# Altium PCB Copy of auto switch electric bike charger_PCB.PcbDoc
Units mil, origin at the board's own origin, x right, y up, seen from the top; angles counter-clockwise.
Board outline 5122.14 x 2410.03 mil, 2 copper layers (Top Layer, Bottom Layer); 10 components, 26 nets, 103 pads, 0 vias.
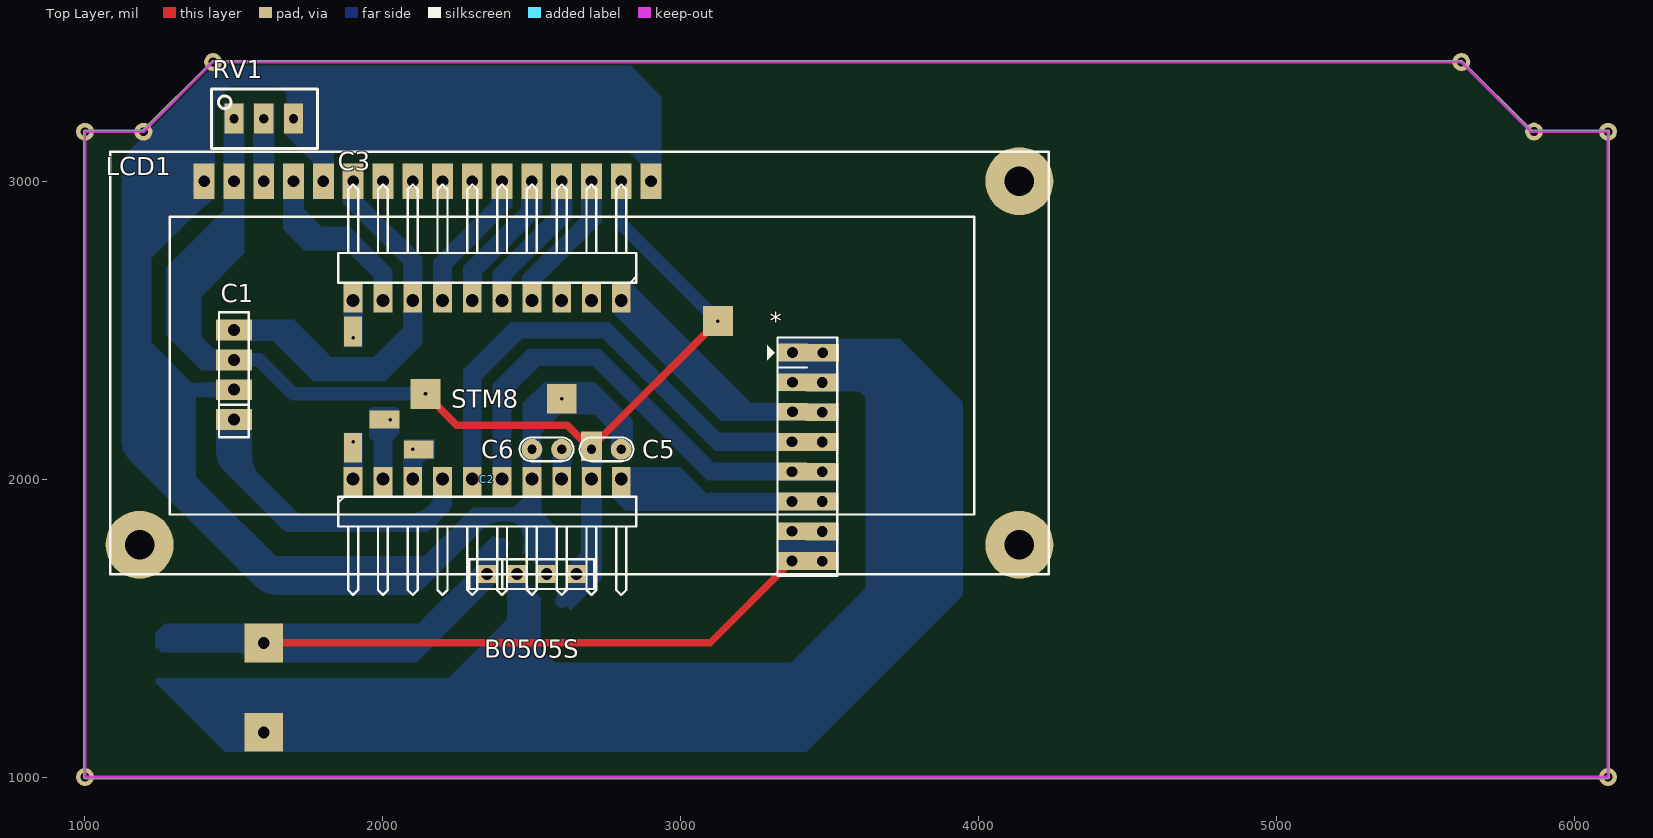
[diagram p0: Top Layer view]
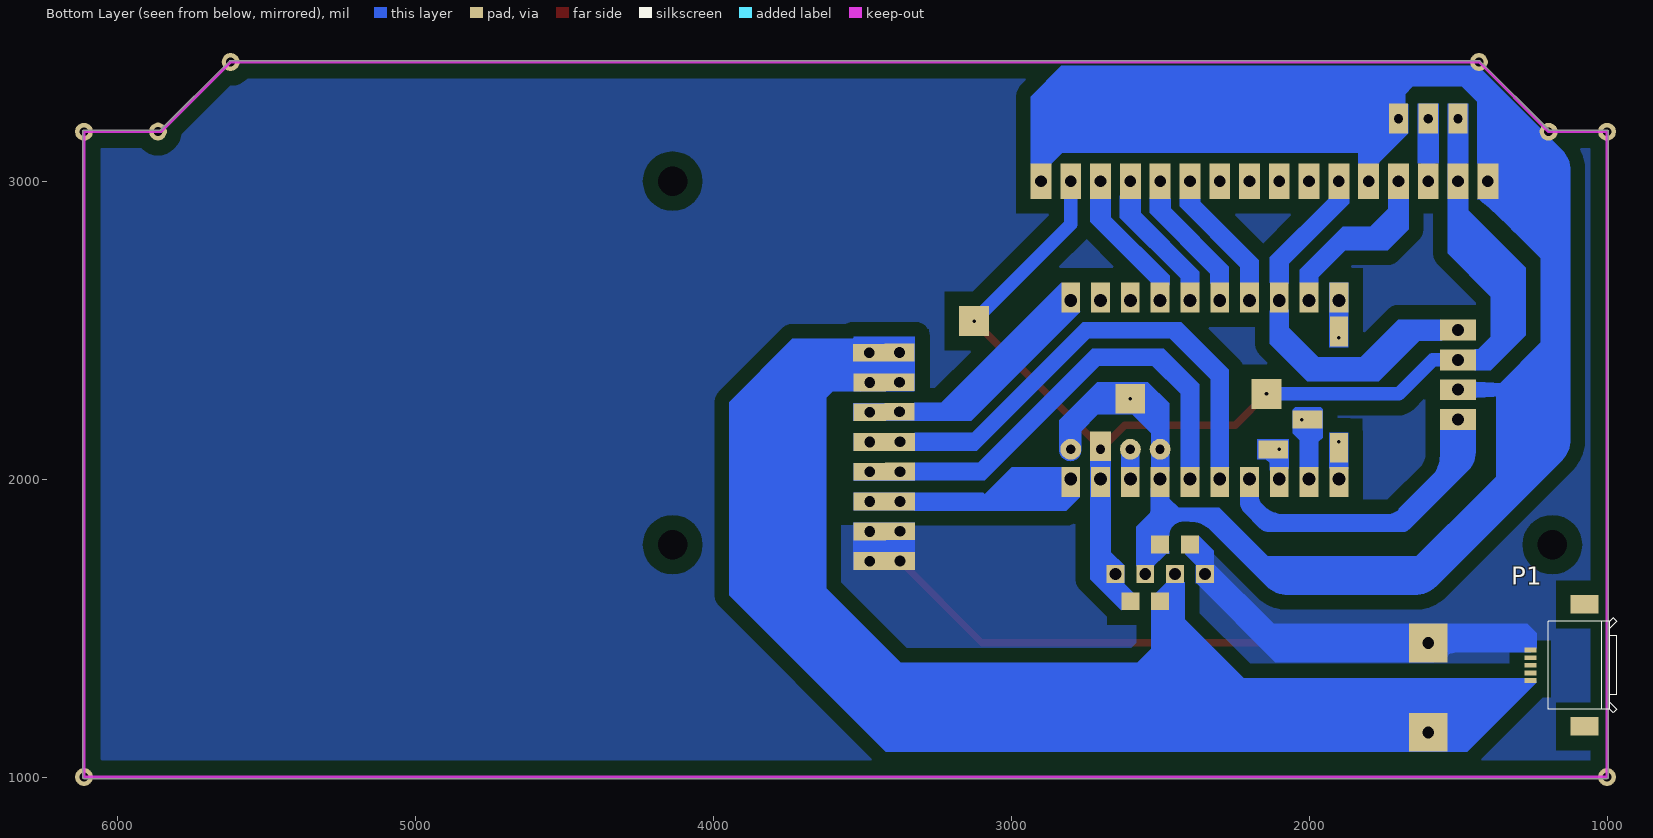
[diagram p1: Bottom Layer view, seen from below]

## Layer stack, top to bottom
Top Solder: solder mask 0.4, Solder Resist, Dk 3.5
Top Layer: signal copper 1.4
Dielectric 1: dielectric 12.6, FR-4, Dk 4.8
Bottom Layer: signal copper 1.4
Bottom Solder: solder mask 0.4, Solder Resist, Dk 3.5

## Board outline
994.99,1000 994.99,3166 cw(c1000,3166) 1000,3171.01 1193.92,3171.01 1426.45,3403.55 1426.44,3403.53 cw(c1430,3400) 1430,3405.01 5620,3405.01 cw(c5620,3400) 5623.56,3403.53 5623.55,3403.55 5856.08,3171.01 6112.11,3171.01 cw(c6112.11,3166) 6117.13,3166 6117.13,1000 cw(c6112.11,1000) 6112.11,994.99 1000,994.99 cw(c1000,1000)

## Design rules (kind name [scope] priority, off if disabled: settings)
Clearance [All] p1: gap=50 ignorepadtopadclearanceinfootprint=FALSE except(0: Arc-Hole Track-Hole SMDPad-Hole THPad-Hole Via-Hole Fill-Hole Poly-Hole Region-Hole Text-Hole)
PlaneClearance [All] p1: clearance=23
PlaneConnect [All] p1: planeconnectstyle=Direct reliefexpansion=20 reliefentries=4 reliefconductorwidth=10 reliefairgap=10
PolygonConnect [All] p1: connectstyle=Direct reliefconductorwidth=10 reliefentries=4 polygonreliefangle="90 Angle" airgapwidth=10
RoutingVias [All] p1: holewidth=28 width=50 viastyle="Through Hole" minholewidth=28 minwidth=50 maxholewidth=28 maxwidth=50
SolderMaskExpansion [All] p1: expansion=4
Width [All] p1: maxlimit=45 minlimit=15 preferedwidth=30 toplayer_minwidth=25 toplayer_maxwidth=40 minimp=50.000000 maximp=50.000000 favimp=50.000000
28 further rules are at their usual default settings.

## Components (designator, comment, footprint, x,y, rotation, side; value= is the part's Value field where it differs from the comment)
* "JP8X2" JP8X2 3374.5,2424.5 r270 top
B0505S "JP4" JP4-C1T#1 2350,1681.1 r0 top
C1 "JP4" JP4-C1T#2 1500,2200 r90 top
C2 "JP10" JP10-D1C 2850,1900 r0 top
C3 "JP10" JP10-D1C 1850,2700 r180 top
C5 "Cap Non-Pol" CN1#1 2700,2100 r0 top
C6 "Cap Non-Pol" CN1#2 2600,2100 r180 top
LCD1 "LCD 16x2A" LCD16X2 1400,3000 r0 top
P1 "ZX62M-B-5P(01)" HRS_ZX62M-B-5P(01) 1125,1375 r90 bottom
RV1 "RV20K" RVAR10K 1600,3210 r0 top

## Footprints (in the part's own frame and the unit in brackets; to place one, negate y for a bottom-side part, rotate by r counter-clockwise, add the part's x,y. Pads: shape width x height; smd on the part's side, far side on the other; paste and mask are expansions set on the pad)
CN1#1 [mil]
  rect 70x100 hole 31 copper offset 0,10: 1(0,0)
  round 70 hole 31: 2(100,0)
  silkscreen extent -40,-40 141,40, body extent -60,-30 170,37, height 265
CN1#2 [mil]
  round 70 hole 31: 1(0,0) 2(100,0)
  silkscreen extent -40,-40 141,40, body extent -60,-30 170,37, height 265
HRS_ZX62M-B-5P(01) [mm]
  rect 0.4x1.05 smd: 1(-1.3,3.355) 2(-0.65,3.355) 3(0,3.355) 4(0.65,3.355) 5(1.3,3.355)
  rect 1.6x2.4 smd: S1(5.2,-1.27) S2(-5.2,-1.27)
  rect 0x0 smd: S3(-5.2,3.03) S4(-2.35,5.13) S5(2.35,5.13) S6(5.2,3.03)
  silkscreen extent -4.05,-4.02 4.05,1.83
JP4-C1T#1 [mil] "4 row, straight, gold plating"
  rect 60x60 hole 40.16: 1(0,0) 2(100,0) 3(200,0) 4(300,0)
  silkscreen extent -60,-50 360,50, body extent -60,-49 360,49, height 335
JP4-C1T#2 [mil] "4 row, straight, gold plating"
  rect 70x120 hole 40.16: 1(0,0) 2(100,0) 3(200,0) 4(300,0)
  silkscreen extent -60,-50 360,50, body extent -60,-49 360,49, height 335
JP8X2 [mil]
  rect 60x100 hole 36: 1(-0.5,0.5) 2(99.5,0.5) 3(198.5,0.5) 4(299.5,-1.5) 5(399.5,-1.5) 6(499.5,-1.5) 7(599.5,-1.5) 8(699.5,-1.5)
  rect 60x110 hole 36: 9(0.5,101.5) 10(100,100) 11(200,100) 12(300,100) 13(400,100) 14(500,100) 15(600,100) 16(700,100)
  silkscreen extent -51,-85 750,151, body extent -50,-50 750,150, height 335
JP10-D1C [mm] "10 pins, 1 row, right angled, gold plating"
  rect 1.6x2.54 hole 1.1 copper offset 0,-0.254: 1(-24.13,2.54) 2(-21.59,2.54) 3(-19.05,2.54) 4(-16.51,2.54) 5(-13.97,2.54) 6(-11.43,2.54) 7(-8.89,2.54) 8(-6.35,2.54) 9(-3.81,2.54) 10(-1.27,2.54)
  silkscreen extent -25.4,-7.34 0,1.04, body extent -25.4,-7.52 0,2.84, height 2.55
LCD16X2 [mil] "LCD dipslay 16x2, 16 pin"
  rect 70x120 hole 39.37: 1(0,0) 2(100,0.02) 3(200,0) 4(300,0) 5(400,0) 6(500,0) 7(600,0) 8(700,0) 9(800,0) 10(900,0) 11(1000,0) 12(1100,0) 13(1200,0) 14(1300,0) 15(1400,0) 16(1500,0)
  round 0 all layers, no hole: M1(-216.54,0)
  round 228.35 / inner round 0 / far side round 0 hole 98.43 unplated: M2(2736.22,0) M3(-216.54,-1220.47) M4(2736.22,-1220.47)
  silkscreen extent -315,-1319 2835,98, body extent -320,-1357 2849,80, height 714
RVAR10K [mil] "Bien tro vi chinh"
  rect 65x100 hole 31.5: 1(-100,0) 2(0,0) 3(100,0)
  silkscreen extent -176,-100 181,100, body extent -179,-94 184,94, height 473

## Part data
B0505S C1 C2 C3: "WR-PHD 2.54 mm Angled Socket Header"
C5 C6: "Capacitor"
LCD1: library part LCD16x2A, "LCD dipslay 16 char, 2 line"
P1: "Conn Rcpt Micro Usb b Mid Mnt"
RV1: library part "Variable Resistor", "Variable Resistor"

## Free pads (board coordinates)
  rect 60x60 smd far side: 2(2400,1780) 2(2500,1590) 2(2500,1780) ""(2600,1590)
  rect 130x130 hole 40: 5(1600,1150) 5(1600,1450)
  rect 60x100 hole 11.81 copper offset 0,-20: 5(1900,2125)
  rect 60x100 hole 11.81 copper offset 0,20: 5(1900,2475)
  rect 100x60 hole 11.81 copper offset -20,0: 5(2025,2200)
  rect 100x60 hole 11.81 copper offset 20,0: 5(2100,2100)
  rect 100x100 hole 11.81: 5(2142.93,2285.85) 5(2600,2270) 5(3124.42,2530.49)
  round 60 hole 30: 7(6112.11,3166) 8(6112.11,1000) 9(1000,1000) 10(1000,3166) 11(1196,3166) 12(1430,3400) 13(5620,3400) 15(5863.94,3166.58)

## Nets (pads, with @x,y where several pads share a name; then routed paths per layer and width w, separated by ;. In a path a pad name is that pad's centre, name@x,y a point inside that pad or via, vN(x,y) a via of type N, cw(c..) or ccw(c..) an arc to the next point about the centre after c; other vN are vias at no path point)
0V: B0505S.3 C1.2 C2.7 C5.2 C6.2 LCD1.1 LCD1.5 LCD1.16 pad.2@2500,1780 pad.5@2600,2270 RV1.3 | length 5940.3
  Bottom Layer w45: C1.2 1350,2300 ; LCD1.5 1800,3110 RV1.3 ; B0505S.3 2550,1750 2520,1780 2500,1780 2500,1880 ; C5.2 2800,2200 2730,2270 2600,2270 2500,2170 C6.2 C2.7 2500,1880 ; LCD1.16 2900,3068.5 2850,3118.5 1944.32,3118.5 1852.82,3210 RV1.3 ; 1350,2300 1200,2450 1200,2750 1400,2950 LCD1.1 1400,3262.82 1477.18,3340 1660,3340 1700,3300 RV1.3 ; 1350,2300 1350,2000 1680,1670 2110,1670 2320,1880 2500,1880
"+220 AC -": 
+Vo: B0505S.4 C1.3 C2.9 C5.1 LCD1.2 LCD1.15 pad. pad.5@2142.93,2285.85 pad.5@3124.42,2530.49 RV1.1 | length 4058.7
  Top Layer w25: pad.5@2142.93,2285.85 2247.84,2180.94 2619.06,2180.94 C5.1 2700,2106.07 pad.5@3124.42,2530.49
  Top Layer w40: pad.5@3124.42,2530.49 pad.5@3125.27,2530.49
  Bottom Layer w45: RV1.1 LCD1.2 1500,2825.72 1351.82,2677.54 1351.82,2481.86 1433.68,2400 C1.3 1585.11,2400 1699.26,2285.85 pad.5@2142.93,2285.85 ; pad. 2650,1640 B0505S.4 2700,1731.1 C2.9 C5.1 ; LCD1.15 2800,2855.76 pad.5@3125.27,2530.49
DOWN: C2.1 pad.5@1900,2125 | length 125
  Bottom Layer w45: C2.1 pad.5@1900,2125
GND: *.7 *.8 *.15 *.16 B0505S.1 P1.5 pad.2@2400,1780 pad.5@1600,1450 | length 3508.4
  Top Layer w25: pad.5@1600,1450 3098,1450 *.8
  Bottom Layer w15: P1.5 1576.18,1426.18 pad.5@1600,1450
  Bottom Layer w45: pad.5@1600,1450 2118.9,1450 B0505S.1 2350,1730 pad.2@2400,1780 ; *.16 3474,1725 *.8 *.7 3373.5,1824.5 *.15
IN1L: *.3 *.11 C3.1 | length 844.7
  Bottom Layer w45: C3.1 2800,2575 2825,2550 3149,2226 *.3 3473,2226 *.11
IN2L: *.4 *.12 C2.5 | length 1742.2
  Bottom Layer w45: C2.5 2300,2350 2450,2500 2750,2500 3125,2125 *.4 3373.5,2124.5 *.12
IN3L: *.5 *.13 C2.6 | length 1585.6
  Bottom Layer w45: C2.6 2400,2310 2500,2410 2715,2410 3100,2025 *.5 3474,2025 *.13
IN4L: *.6 *.14 C2.10 | length 705.8
  Bottom Layer w45: C2.10 3000,2000 3075,1925 *.6 3373.5,1924.5 *.14
LCD_D4: C3.7 LCD1.11 | length 482.8
  Bottom Layer w45: C3.7 2200,2719.95 2400,2919.95 LCD1.11
LCD_D5: C3.6 LCD1.12 | length 482.8
  Bottom Layer w45: C3.6 2300,2700 2500,2900 LCD1.12
LCD_D6: C3.5 LCD1.13 | length 482.8
  Bottom Layer w45: C3.5 2400,2683.51 2600,2883.51 LCD1.13
LCD_D7: C3.4 LCD1.14 | length 482.8
  Bottom Layer w45: C3.4 2500,2667.74 2700,2867.74 LCD1.14
LCD_EN: C1.4 C3.8 LCD1.6 | length 1286.4
  Bottom Layer w45: C1.4 1677.42,2500 1802.42,2375 1975,2375 2100,2500 C3.8 2100,2740 1900,2940 LCD1.6
LCD_RS: C3.9 LCD1.4 | length 582.8
  Bottom Layer w45: LCD1.4 1700,2900 1790,2810 1890,2810 2000,2700 C3.9
LEFT: C2.2 pad.5@2025,2200 | length 210.4
  Bottom Layer w45: C2.2 2000,2175 pad.5@2025,2200
NetLCD1_3: LCD1.3 RV1.2 | length 210
  Bottom Layer w45: LCD1.3 RV1.2
NRST: C1.1 C2.4 | length 1047.7
  Bottom Layer w45: C1.1 1500,2050 1700,1850 2140,1850 2200,1910 2200,1950 C2.4
PB4: C3.2
PC3: C3.3
PD3: C3.10 pad.5@1900,2475 | length 125
  Bottom Layer w45: pad.5@1900,2475 C3.10
PD6: C2.3 pad.5@2100,2100 | length 100
  Bottom Layer w45: C2.3 pad.5@2100,2100
VCAP: C2.8 C6.1 | length 100
  Bottom Layer w45: C2.8 C6.1
Vin: *.2 *.10 B0505S.2 P1.1 pad.2@2500,1590 pad.5@1600,1150 | length 4649.7
  Bottom Layer w15: P1.1 1426.18,1323.82 pad.5@1600,1150
  Bottom Layer w45: pad.5@1600,1150 2120,1150 ; B0505S.2 2450,1640 2500,1590 2500,1530 2120,1150 ; 3476,2424 3376,2424 3375,2425 *.2 3474,2325 *.10 3635.5,2324.5 3710,2250 3710,1580 3280,1150 2120,1150
VRL: *.1 *.9
"~220 AC +": 
pads on no net: LCD1.7 LCD1.8 LCD1.9 LCD1.10 LCD1.M1 LCD1.M2 LCD1.M3 LCD1.M4 P1.2 P1.3 P1.4 P1.S1 P1.S2 P1.S3 P1.S4 P1.S5 P1.S6

## Polygon pours and split planes (outlines as drawn)
GND on Bottom Layer "NONET_L-01_P-001" (solid, pour order 2): 1427.53,3398.35 5621.65,3398.35 5859.28,3160.72 6114.91,3160.72 6114.91,1002.8 6112.11,1000 6111.52,1000.59 994.27,1000.59 994.27,3160.27 1000,3166 1003.42,3162.58 1190.47,3162.58

## Keep-outs
Keep-Out Layer:
  lines w10: 1000,1000 1000,3166 1196,3166 1430,3400 5620,3400 5854,3166 6112.11,3166 6112.11,1000 4058,1000 2278.03,1000 1000,1000

## Other copper
Bottom Layer:
  rectangle net Vin: 3322.24,2295.59 3529.27,2478.36
  rectangle net IN1L: 3325.78,2195.36 3530.09,2256.11
  rectangle net IN2L: 3323.12,2094.64 3528.81,2154.88
  rectangle net IN3L: 3323.54,1993.93 3529.77,2054.04
  rectangle net IN4L: 3321.94,1895.13 3529.77,1954.28
  rectangle net GND: 3322.58,1694.65 3531.05,1855.16
  region net Vin: 1237.33,1316.75 1469.41,1084.67 3420.62,1084.67 3946.77,1610.82 3946.77,2258.81 3734.39,2471.18 3437.18,2471.18 3437.18,2362.08 3506.16,2293.11 3528.73,2315.68 3621.53,2315.68 3621.53,1633.48 3370.97,1382.93 2530.08,1382.93 2530.08,1601.23 2479.95,1651.35 2463.12,1671.42 2446.79,1671.42 2429.47,1654.1 2417.06,1654.1 2417.06,1529.51 2218.54,1330.99 1634.95,1330.99 1238.56,1330.99
  region net 0V: 2470.21,1750.22 2482.12,1750.22 cw(c2482.12,1708.86) 2511.36,1738.1 cw(c2490.69,1717.43) 2519.93,1717.43 2519.93,1710.84 ccw(c2527.59,1710.84) 2522.17,1705.42 2525.79,1701.8 2533.13,1709.15 cw(c2537.51,1704.77) 2537.51,1710.96 2537.51,1721.37 ccw(c2484.95,1721.37) 2522.11,1758.54 ccw(c2518.83,1755.25) 2518.83,1759.9 2487.3,1759.9
  pour cut-out: 1686.25,1869.64 1710.89,1845 cw(c1752.56,1803.33) 1721.37,1853.33 ccw(c1677.74,1805.39)
  region net NRST: 1698.63,1899.67 1559.09,2039.21 cw(c1629.8,2109.92) 1529.8,2109.92 1529.8,2170.2 cw(c1529.8,2185.57) 1518.93,2174.7 1501.89,2191.74 1501.89,2090.46 ccw(c1601.89,2090.46) 1531.18,2019.75 1696.07,1854.85
  region net NRST: 1662.9,1832.72 ccw(c1721.35,1889.44) 1663.76,1831.85 ccw(c1685.64,1853.73) 1673.8,1825.14 ccw(c1685.64,1853.73) 1685.64,1822.79 2135.09,1822.79 ccw(c2135.09,1865.45) 2165.26,1835.28 2218.02,1888.04 ccw(c2185.19,1920.86) 2231.61,1920.86 2231.61,1941.97 2203.91,1952.5 2203.91,1933.15 ccw(c2208.44,1933.15) 2205.23,1929.94 2157.94,1882.65 ccw(c2178.33,1862.26) 2149.5,1862.26 2135.03,1862.26 2192.46,1919.69 cw(c2195.52,1922.75) 2191.19,1922.75 2191.19,1955.36 2169.2,1943.38 cw(c2129.95,1943.38) 2157.71,1915.62 2152.77,1910.68 cw(c2083.72,1979.73) 2083.72,1882.08 1739.47,1882.08 cw(c1739.47,1941.87) 1697.19,1899.59 1684.78,1887.18 ccw(c1701.76,1870.2) 1678.68,1876.83 ccw(c1639.9,1829.97) 1672.75,1881.16 ccw(c1644.92,1873.61) 1671.97,1883.62 ccw(c1674.67,1888.65) 1674.67,1882.94 ccw(c1674.67,1892.46) 1681.41,1885.73 1696.77,1901.09 1589.52,2008.34 cw(c1660.23,2079.05) 1560.23,2079.05 1560.23,2165.48 ccw(c1543.08,2148.33) 1543.08,2172.59 1441.06,2172.59 1441.06,2099.3 ccw(c1541.06,2099.3) 1441.58,2089.12 1441.06,2089.45 ccw(c1525.32,2089.45) 1465.74,2029.87 1662.89,1832.72 ccw(c1636.66,1858.95)
  region net 0V: 2530.06,2039.76 2530.06,2154.66 2593.25,2217.85 2708.61,2217.85 2765.5,2160.96 2765.5,2095.27 ccw(c2800.33,2095.27) 2800.33,2060.43 ccw(c2800.33,2099.29) 2839.19,2099.29 2839.19,2197.42 2711,2325.6 2540.79,2325.6 2469.09,2253.91 2469.09,2025.98 2491.11,2003.95
  region net 0V: 2569.4,1700.3 2571.22,1698.48 2579.8,1710.69 2579.8,1840.22 2533.22,1886.8 cw(c2631.52,1905.16) 2531.52,1905.16 2531.52,1969.8 ccw(c2559.33,1941.99) 2520.15,1945.39 2519.64,1944.89 2492.5,1944.89 2497.71,1950.1 2482.36,1944.89 2474.7,1944.89 cw(c2474.7,1946.57) 2473.02,1946.57 2470.25,1940.78 2468.56,1940.2 2468.56,1934.12 2438.11,1903.67 2302.38,1903.67 2139.44,1740.73 1626.17,1740.73 1549.19,1785.38 1503.59,1851.45 1480.33,1881.23 1416.52,1918.04 1382.6,1958.46 1355.62,2027.34 1358.41,2058.98 1358.41,2132.97 1335.15,2322.34 1225.34,2410.75 1220.63,2408.06 1189.97,2591.29 1193.92,2651.57 1206.73,2749.49 1387.26,2948.65 1387.26,3003.22 1434.88,3059.88 1434.88,3265.95 1489.98,3321.05 1685.07,3321.05 1688.37,3324.34 1688.37,3260.09 1670.18,3260.09 1667.8,3257.71 1667.8,3160.14 1764.93,3063 1764.93,3059.9 1804.2,3050.22 1829.1,3054.2 1834.9,3060 1834.9,3095.84 2829.12,3095.84 2865.7,3059.26 2865.7,3057.28 2894.86,3057.28 2914.33,3037.81 2935,3058.49 2935,3284.06 2832.13,3386.93 1432.84,3386.93 1408.66,3362.76 1152.26,3106.35 ccw(c1222.97,3035.64) 1122.97,3035.64 1122.97,2132.97 ccw(c1222.97,2132.97) 1152.26,2062.26 1573.88,1640.64 ccw(c1644.59,1711.35) 1644.59,1611.35 2071.25,1611.35 ccw(c2071.26,1711.35) 2141.97,1640.64 2329.54,1828.21 cw(c2400.25,1757.51) 2400.25,1857.5 2400.93,1857.5 2400.79,1857.77 2422.23,1857.77 cw(c2422.23,1809.88) 2470.12,1809.88 2470.12,1809.15 ccw(c2477.89,1809.15) 2475.16,1801.88 2470.21,1750.22 2480.17,1750.22 2529.78,1700.6 2529.78,1683.82 2552.93,1683.82
  region net IN4L: 2830.14,2040.43 2998.38,2040.43 3089.39,1949.43 3094.17,1954.21 3333.05,1954.21 3333.05,1902.12 3324.68,1893.74 2815.16,1893.74 2769.66,1939.24 2786.43,1956.01 2786.43,1988.34
  region net 0V: 2530.06,1940.12
  region net NRST: 1697.19,1899.59
  region: 1441.74,2264.8
  region: 1468.35,3212.38
  region: 1467.57,3187.75
  region net +Vo: 1465.12,3059.9 1493.99,3051.89 1534.88,3051.89 1534.88,3260.07 1465.12,3260.07
  region net NetLCD1_3: 1565.12,3059.88 1576.67,3059.88 1577.5,3045.08 1622.5,3045.08 1622.67,3059.88 1634.88,3059.88 1634.88,3260.01 1565.12,3260.01
  region net +Vo: 1465.18,2940.2 1465.18,2901.79 1272.12,2708.72 1272.12,2482.46 1389.54,2365.04 1444.34,2365.04 1444.34,2434.72 1443.93,2435.13 1432.62,2435.13 1389.54,2478.21 1389.54,2612.93 1535.04,2758.44 1535.04,3081.08
  region net LCD_EN: 1559.6,2534.96 1700.38,2534.96 1826.42,2408.92 1969.01,2408.92 2068.36,2508.26 2068.36,2568.39 2129.17,2568.39 2131.85,2565.71 2131.85,2453.75 2006.45,2328.35 1766.2,2328.35 1629.58,2464.97 1554.64,2464.97 1538.38,2481.24
  region net PD3: 1868.58,2659.89 1868.58,2442.74 1931.56,2442.74 1931.56,2659.52
  region net LCD_RS: 1968.76,2659.88 2000.34,2648 2000.34,2650.22 2012.11,2638.45 2031.35,2659.58 2031.35,2701.9 1886.45,2846.8 1795.1,2846.8 1734.64,2907.26 1734.64,2979.98 1677.66,3036.96 1665.23,3024.53 1665.23,2839.28 1736.72,2767.78 1879.33,2767.78 1968.76,2678.35
  region net LCD_EN: 1865.22,2926.1 2068.51,2722.82 2068.51,2657.26 2078.76,2647 2118.5,2647 2131.38,2659.88 2131.38,2744.05 1929.69,2945.74 1900.22,2945.74 1865.22,2941.2
  region net LCD_D4: 2365.07,2941.43 2365.07,2931.69 2168.8,2735.41 2168.8,2656.26 2228.95,2656.26 2231.07,2658.39 2231.07,2711.56 2434.96,2915.45 2434.96,2941.23 2410.1,2941.23 2403.07,2948.27
  region net LCD_D5: 2465.08,2940.88 2465.08,2908.47 2268.85,2712.25 2268.85,2658.48 2282.79,2644.53 2317.65,2644.53 2331.25,2658.14 2331.25,2689.34 2535.39,2893.48 2535.39,2944.27 2513.82,2944.27 2512.82,2945.26
  region net LCD_D6: 2565.18,2940.95 2565.18,2893.3 2368.73,2696.86 2368.73,2658.96 2380.51,2647.18 2420.01,2647.18 2431.45,2658.62 2431.45,2673.69 2634.96,2877.21 2634.96,2951.89 2612.54,2951.89 2608.51,2955.91
  region net LCD_D7: 2665.18,2941.07 2665.18,2878.97 2468.48,2682.27 2468.48,2651.74 2468.93,2651.29 2527.96,2651.29 2527.96,2657.16 2735.22,2864.41 2735.22,2941.93 2721.17,2941.93 2711.11,2951.99
  region net DOWN: 1868.79,2034.24 1868.79,2155.75 1931.97,2155.75 1931.97,2036.97
  region net LEFT: 1968.54,2040.6 1968.54,2125.23 1954.93,2138.84 1954.93,2234.03 1961.28,2240.38 2046.22,2240.38 2054.38,2232.22 2054.38,2153.64 2031.38,2130.64 2031.38,2039.88 2023.15,2031.66 2006.02,2023.37
  region net PD6: 2068.71,2036.92 2068.71,2133.17 2173.28,2133.17 2173.28,2067.27 2144.8,2067.27 2131.7,2054.17 2131.7,2029.64 2093.45,2029.64 2086.78,2022.98
  region net IN2L: 2268.62,2039.88
  region net IN1L: 2831.1,2659.64 3234.87,2255.88 3325.12,2255.88 3325.12,2196.12 3134.37,2196.12 2768.37,2562.12 2794.48,2588.22 2794.48,2629.43
  region net IN2L: 3323.12,2154.88 3130.32,2154.88 2759.35,2525.85 2428.92,2525.85 2269.47,2366.39 2269.47,2040.56 2274.88,2040.56 2290.96,2024.47 2315.86,2024.47 2330.66,2039.28 2330.66,2335.68 2467,2472.02 2738.48,2472.02 3115.38,2095.12 3323.12,2095.12 3323.12,2103.69 3336.77,2117.35
  region net IN3L: 2368.62,2039.88
  region net IN3L: 2431.38,2039.88 2431.38,2286.26 2525.76,2380.64 2703.82,2380.64 3088.09,1996.36 3323.07,1996.36 3338.85,2012.14 3338.85,2039.15 3323.12,2054.88 3110.73,2054.88 2728.63,2436.99 2488.03,2436.99 2369.47,2318.43 2369.47,2032.07 2386.38,2032.07 2397.87,2020.58
  region net VCAP: 2569.94,2039.76 2569.94,2112.02 2586.45,2128.53 2614.49,2128.53 2630.06,2112.96 2630.06,2039.76 2613.84,2039.76 2598.07,2023.99
  region net +Vo: 2669.94,2039.76 2669.94,2105.48 2688.58,2124.12 2710.23,2124.12 2730.06,2104.29 2730.06,2033.02 2724.24,2027.19 2695.4,2027.19
  region net GND: 2370.19,1809.89 2320.12,1759.82 2320.12,1669.9 2339.72,1650.3 2340.64,1651.22 2379.88,1651.22 2379.88,1709.93 2378.94,1710.87 2415.13,1747.06 2415.13,1779.03
  pour cut-out: 2353.29,1870.72 2392.32,1874.71 2396.02,1867.31 2396.02,1879.49 2362.07,1879.49
  region net Vin: 3325.92,2300.98 3325.92,2295.32 3598.47,2295.32 3668.21,2225.59 3668.21,1592.28 3276.91,1200.99 2758.21,1200.99 2504.13,1455.06 2497.35,1448.28 2497.35,1144.44 3279.93,1144.44 3716.46,1580.97 3716.46,2286.63 3524.95,2478.14 3491.78,2444.97 3451.07,2444.97
  region net +Vo: 2583.79,1606.69 2630.55,1559.94 2734.93,1664.31 2734.93,2062.64 2695.35,2062.64 2688.03,2069.97 2664.98,2063.95 2664.98,1755.22 2620.45,1710.68 2620.45,1648.59 2583.79,1611.93
  pour cut-out: 3132.42,1144.36 3137.44,1149.38 2503.38,1149.38 2501.59,1147.59 2499.8,1149.38 2443.32,1149.38 2450.01,1171.87 2229.43,1171.87 2206.73,1149.16 2122.34,1149.16 2119.04,1145.86 1800.12,1145.86 1800.12,1144.36
  region net GND: 1518.25,1432.18 1582.22,1385.12 2112.83,1385.12 2380.93,1653.22 2357.17,1676.99 2327.92,1676.99 2320.12,1669.19 2320.12,1714.86 2119.26,1514 1662.23,1514 1662.97,1514.47 1268.04,1514.47 1236.36,1482.78 1236.36,1432.18

## Silkscreen, mask and mechanical layers (free items; w line width, h text height)
Top Overlay:
  text "STM8" at 2230,2240 h60
Bottom Paste:
  region: 1237.12,1316.53 1469.2,1084.45 3420.41,1084.45 3946.56,1610.6 3946.56,2258.58 3734.18,2470.96 3436.97,2470.96 3436.97,2361.86 3505.95,2292.89 3528.52,2315.46 3621.32,2315.46 3621.32,1633.26 3370.76,1382.71 2529.87,1382.71 2529.87,1601 2479.74,1651.13 2462.91,1671.2 2446.58,1671.2 2429.26,1653.87 2416.85,1653.87 2416.85,1529.29 2218.33,1330.77 1634.74,1330.77 1634.74,1330.76 1238.35,1330.76
  region: 2630.39,1559.88 2735.1,1664.59 2735.1,2159.74 2665.09,2159.74 2665.09,1757.63 2619.94,1712.49 2619.94,1648.37 2591.61,1620.04